# Altium PCB pmod-pass-thru-UNIVERSAL.PcbDoc
Units mil, origin at the board's own origin, x right, y up, seen from the top; angles counter-clockwise.
Board outline 1600 x 400 mil, 2 copper layers (Top Layer, Bottom Layer); 3 components, 12 nets, 24 pads, 0 vias.
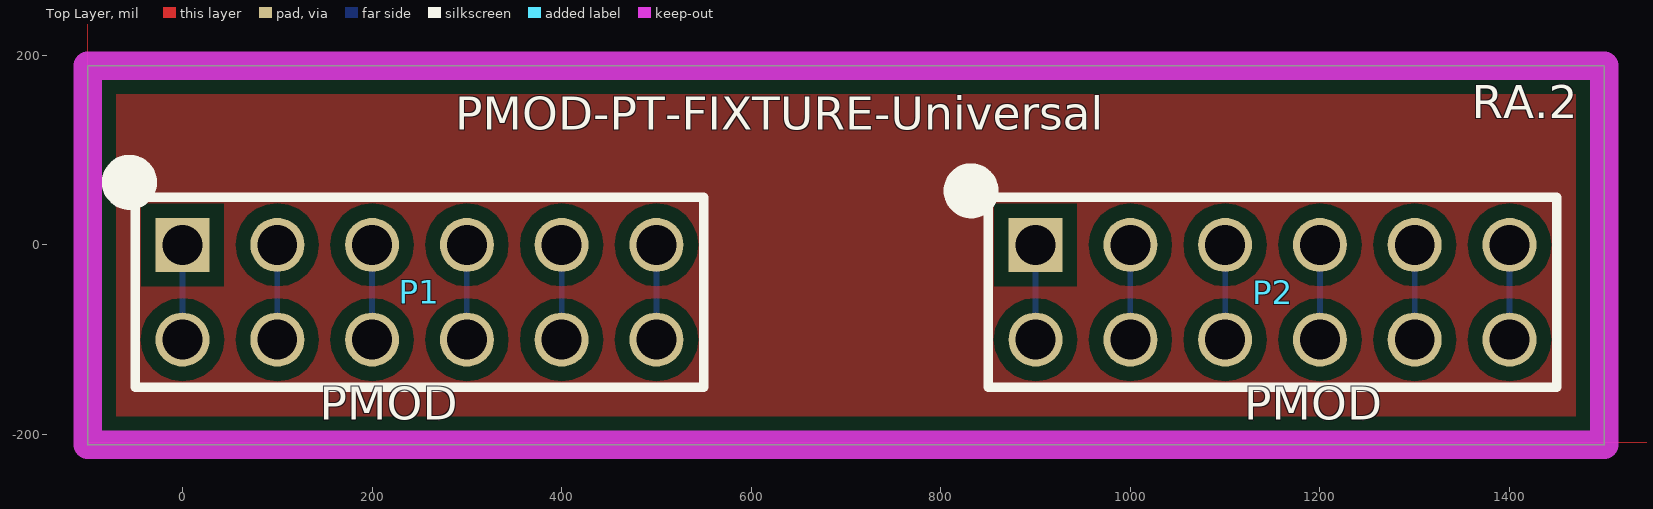
[diagram p0: Top Layer view]
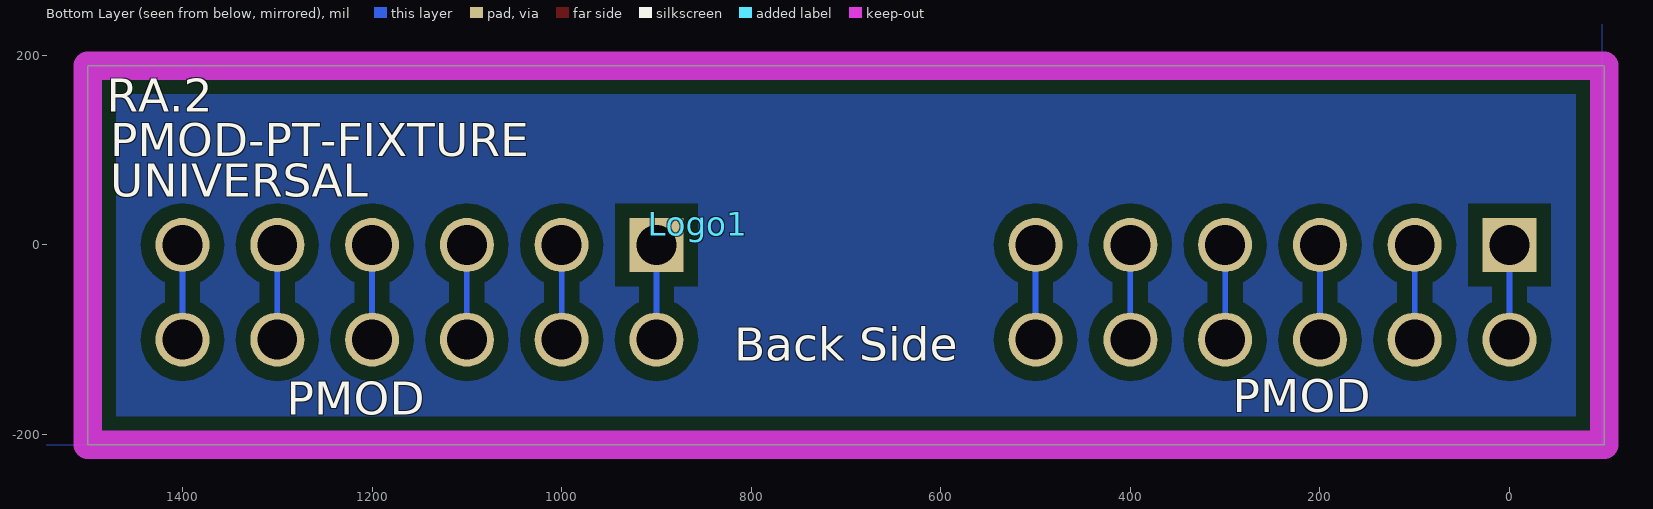
[diagram p1: Bottom Layer view, seen from below]

## Layer stack, top to bottom
Top Layer: signal copper 1.4
Dielectric: core 12.6, FR-4, Dk 4.8
Bottom Layer: signal copper 1.4

## Board outline
-100,-211 1500,-211 1500,189 -100,189

## Design rules (kind name [scope] priority, off if disabled: settings)
Clearance Keepout [onlayer('keep-out layer')] p1: gap=15
Clearance POLY_IN_BGA [(WithinRoom('BGA_INNER'))] p2: gap=6
Clearance POLY_TO_POLY [inpoly vs all] p3: gap=15
Clearance [All] p4: gap=6
FabricationTestPointUsage TestPointUsage [All] p1: valid=0 allowmultiple=FALSE
FabricationTestpoint Testpoint [All] p1: side=3 testpointundercomponent=TRUE minsize=40 maxsize=100 preferedsize=60 minholesize=0 maxholesize=40 preferedholesize=32 testpointgrid=1 allowsidetop=TRUE allowsidebottom=TRUE usegrid=TRUE gridtolerance=0.01
PlaneClearance [All] p1: clearance=10
PolygonConnect "via connect" [isvia] p1: connectstyle=Direct reliefconductorwidth=10 reliefentries=4 polygonreliefangle="90 Angle" airgapwidth=10
PolygonConnect [All] p2: connectstyle=Relief reliefconductorwidth=10 reliefentries=4 polygonreliefangle="90 Angle" airgapwidth=10
RoutingVias [All] p1: holewidth=15 width=25 viastyle="Through Hole" minholewidth=15 minwidth=25 maxholewidth=28 maxwidth=50
SilkToSolderMaskClearance SilkscreenOverComponentPads [IsPad] p1: minsilkscreentomaskgap=10 clearancetoexposedcopper=TRUE
SolderMaskExpansion VIA [isvia and not(locked)] p1: expansion=-100
SolderMaskExpansion SolderMaskExpansion_1 [All] p2: expansion=4
Width [All] p1: maxlimit=20 minlimit=6 preferedwidth=14
24 further rules are at their usual default settings.

## Components (designator, comment, footprint, x,y, rotation, side; value= is the part's Value field where it differs from the comment)
Logo1 "Valent Logo 500" VALENTFX_500-SolderMask 856.5,21.94 r180 bottom
P1 "Value" PMOD-S-TSW-106-07-G-D 0,0 r0 top
P2 "Value" PMOD-S-TSW-106-07-G-D 900,0 r0 top

## Footprints (in the part's own frame and the unit in brackets; to place one, negate y for a bottom-side part, rotate by r counter-clockwise, add the part's x,y. Pads: shape width x height; smd on the part's side, far side on the other; paste and mask are expansions set on the pad)
PMOD-S-TSW-106-07-G-D [mil] "MTSW-106-07-G-D-130-RA"
  rect 57x57 hole 42: 1(0,0)
  round 57 hole 42: 2(100,0) 3(200,0) 4(300,0) 5(400,0) 6(500,0) 7(0,-100) 8(100,-100) 9(200,-100) 10(300,-100) 11(400,-100) 12(500,-100)
  body extent -50,-150 550,50, height 335
VALENTFX_500-SolderMask [mil]

## Part data
P1 P2: library part PMOD-S-TSW-106-07-G-D, "Conn Unshrouded Header Straight HDR 12 POS 2.54mm Solder ST Thru-Hole Bulk"

## Nets (pads, with @x,y where several pads share a name; then routed paths per layer and width w, separated by ;. In a path a pad name is that pad's centre, name@x,y a point inside that pad or via, vN(x,y) a via of type N, cw(c..) or ccw(c..) an arc to the next point about the centre after c; other vN are vias at no path point)
P1_1_7: P1.1 P1.7 | length 100
  Bottom Layer w6: P1.7 P1.1
P1_2_8: P1.2 P1.8 | length 100
  Bottom Layer w6: P1.8 P1.2
P1_3_9: P1.3 P1.9 | length 100
  Bottom Layer w6: P1.9 P1.3
P1_4_10: P1.4 P1.10 | length 100
  Bottom Layer w6: P1.10 P1.4
P1_5_11: P1.5 P1.11 | length 100
  Bottom Layer w6: P1.11 P1.5
P1_6_12: P1.6 P1.12 | length 100
  Bottom Layer w6: P1.12 P1.6
P2_1_7: P2.1 P2.7 | length 100
  Bottom Layer w6: P2.7 P2.1
P2_2_8: P2.2 P2.8 | length 100
  Bottom Layer w6: P2.8 P2.2
P2_3_9: P2.3 P2.9 | length 100
  Bottom Layer w6: P2.9 P2.3
P2_4_10: P2.4 P2.10 | length 100
  Bottom Layer w6: P2.10 P2.4
P2_5_11: P2.5 P2.11 | length 100
  Bottom Layer w6: P2.11 P2.5
P2_6_12: P2.6 P2.12 | length 100
  Bottom Layer w6: P2.12 P2.6

## Polygon pours and split planes (outlines as drawn)
no net on Top Layer "GND_TOP" (solid, remove dead copper, shelved, pour order 5): -100,-209 -100,1162 1615.95,1162 1615.95,-209
no net on Bottom Layer "GND_BOT" (solid, shelved, pour order 6): -98,-211 -98,1144 1593,1144 1593,-211
no net on Top Layer "blank" (solid, pour order 5): -100,-211 1500,-211 1500,189 -100,189
no net on Bottom Layer "blank" (solid): -100,-211 1500,-211 1500,189 -100,189

## Keep-outs
Keep-Out Layer:
  the board outline again, w30

## Silkscreen, mask and mechanical layers (free items; w line width, h text height)
Top Overlay:
  circle w40: c-56,66 r9
  circle w40: c832,57 r9
  lines w10: -50,-150 550,-150 550,50 -50,50 -50,-150 ; 850,-150 1450,-150 1450,50 850,50 850,-150
  text "RA.2" at 1360,122 h60
  text "PMOD-PT-FIXTURE-Universal" at 288,110 h60
  text "PMOD" at 145,-196 h60
  text "PMOD" at 1120,-196 h60
Bottom Overlay:
  text "RA.2" at 1480,129 h60
  text "PMOD-PT-FIXTURE" at 1476,82 h60
  text "UNIVERSAL" at 1476,39 h60
  text "Back Side" at 818,-134 h60
  text "PMOD" at 292,-188 h60
  text "PMOD" at 1290,-191 h60
Mechanical 2:
  lines w10: -682,-126 -662,-186 ; -682,3754 -662,3814 ; -672,-186 -652,-186 ; -672,3814 -652,3814 ; -662,1533.09 -662,-186 ; -662,2094.91 -662,3814 ; -642,-126 -662,-186 ; -642,3754 -662,3814 ; -162,-596 -162,-576 ; -102,-606 -162,-586 ; -102,-566 -162,-586 ; 2057.09,-586 -162,-586 ; 2618.91,-586 4838,-586 ; 4778,-606 4838,-586 ; 4778,-566 4838,-586 ; 4838,-596 4838,-576
  text "4000 (mil)" at -626.01,1543.09 h60 r90
  text "5000 (mil)" at 2067.09,-621.99 h60
Mechanical 3:
  text "Specs" at 6338.89,3126.78 h60
  text "http://www.4pcb.com/index.php?load=content&page_id=131" at 6338.89,3026.78 h60
  text "Line/Space:" at 6338,2914 h60
  text "6 mil" at 7438,2914 h60
  text "Min Hole:" at 6338,2814 h60
  text "15 mil" at 7438,2814 h60
  text "Annular Ring Via:" at 6338,2714 h60
  text "10 mil" at 7438,2714 h60
  text "Annular Ring Comp Hole:" at 6338,2614 h60
  text "15 mil" at 7738,2614 h60
  text "Layers:" at 6338,2514 h60
  text "4" at 7438,2514 h60
  text "Copper:" at 6338,2414 h60
  text "1oz" at 7438,2414 h60
  text "Lead:" at 6338,2314 h60
  text "Lead Free" at 7438,2314 h60
  text "Plating:" at 6338,2214 h60
  text "Plated" at 7438,2214 h60
  text "Silkscreen:" at 6338,2114 h60
  text "Top / Bottom" at 7438,2114 h60
  text "Solder Mask:" at 6338,2014 h60
  text "Top Bottom - Green" at 7438,2014 h60
  text "Scoring - Tab:" at 6338,1914 h60
  text "None" at 7438,1914 h60
  text "Max Size:" at 6338,1814 h60
  text "30 in^2" at 7438,1814 h60
  text "Revisions" at 6338.89,1226.78 h60
  text "1" at 6338.89,1129.14 h60
  text "- Adding- ADC components to the top layer" at 6612,1116 h60
  text "- Moving the touch signals to bottom layer" at 6612,1016 h60
  text "Notes" at 6338,114 h60
Mechanical 16:
  lines w5: -4962,-1511 -4762,-1511 ; -4962,1264 -4762,1264 ; -4962,4039 -4762,4039 ; -3022,-4286 -3022,-4086 ; -3022,6614 -3022,6814 ; -1087,-4286 -1087,-4086 ; -1087,6614 -1087,6814 ; 848,-4286 848,-4086 ; 848,6614 848,6814 ; 2788,-4286 2788,-4086 ; 2788,6614 2788,6814 ; 4723,-4286 4723,-4086 ; 4723,6614 4723,6814 ; 5838,-3786 10338,-3786 ; 5838,-3486 10338,-3486 ; 6658,-4286 6658,-4086 ; 6658,6614 6658,6814 ; 7338,-4086 7338,-3486 7338,-3186 5838,-3186 5838,-4086 ; 8598,-4286 8598,-4086 ; 8598,6614 8598,6814 ; 9438,-4086 9438,-3486 ; 10338,-3186 4438,-3186 4438,-4086 5838,-4086 ; 10338,-2886 10338,-4086 ; 10338,-1511 10538,-1511 ; 10338,1264 10538,1264 ; 10338,4039 10538,4039 ; 5838,-4086 10338,-4086 ; 10338,-4086 10338,6614 -4762,6614 -4762,-4086 10338,-4086 ; -4962,-4286 10538,-4286 10538,6814 -4962,6814 -4962,-4286
  text "1" at -4015.66,6679 h60
  text "2" at -2085,6679 h60
  text "3" at -145.66,6679 h60
  text "4" at 1795,6679 h60
  text "5" at 3735,6679 h60
  text "6" at 5665,6679 h60
  text "7" at 7615,6679 h60
  text "8" at 9545,6679 h60
  text "A" at -4887,5341 h60
  text "A" at 10413,5341 h60
  text "B" at -4887,2561 h60
  text "B" at 10413,2561 h60
  text "C" at -4887,-219 h60
  text "C" at 10413,-219 h60
  text "D" at -4887,-2979 h60
  text "D" at 10413,-2979 h60
  text "PCB DESIGNER:" at 5888,-3281 h60
  text "TITLE:" at 7438,-3286 h60
  text "Michael Jones" at 5953,-3416 h60
  text "Group VIII Technology" at 4678,-3516 h60
  text "DATE:" at 5888,-3586 h60
  text "PART NO.:" at 7388,-3586 h60
  text "REV:" at 9488,-3586 h60
  text "1652 W 820 N" at 4678,-3616 h60
  text ".PRINT_DATE" at 5938,-3706 h60
  text "Provo, UT 84601" at 4678,-3716 h60
  text "801/379-0118" at 4678,-3816 h60
  text "FILE NAME:" at 5888,-3886 h60
  text "DWG NO:" at 7388,-3886 h60
  text "SCALE:" at 9488,-3886 h60
  text ".PCB_FILE_NAME_NO_PATH" at 5938,-4006 h60
  text "1" at -4015.66,-4221 h60
  text "2" at -2085,-4221 h60
  text "3" at -145.66,-4221 h60
  text "4" at 1795,-4221 h60
  text "5" at 3735,-4221 h60
  text "6" at 5665,-4221 h60
  text "7" at 7615,-4221 h60
  text "8" at 9545,-4221 h60